# Altium PCB Barrier_control.PcbDoc
Units mil, origin at the board's own origin, x right, y up, seen from the top; angles counter-clockwise.
Board outline 2928.12 x 2495 mil, 2 copper layers (Top Layer, Bottom Layer); 57 components, 34 nets, 183 pads, 33 vias.
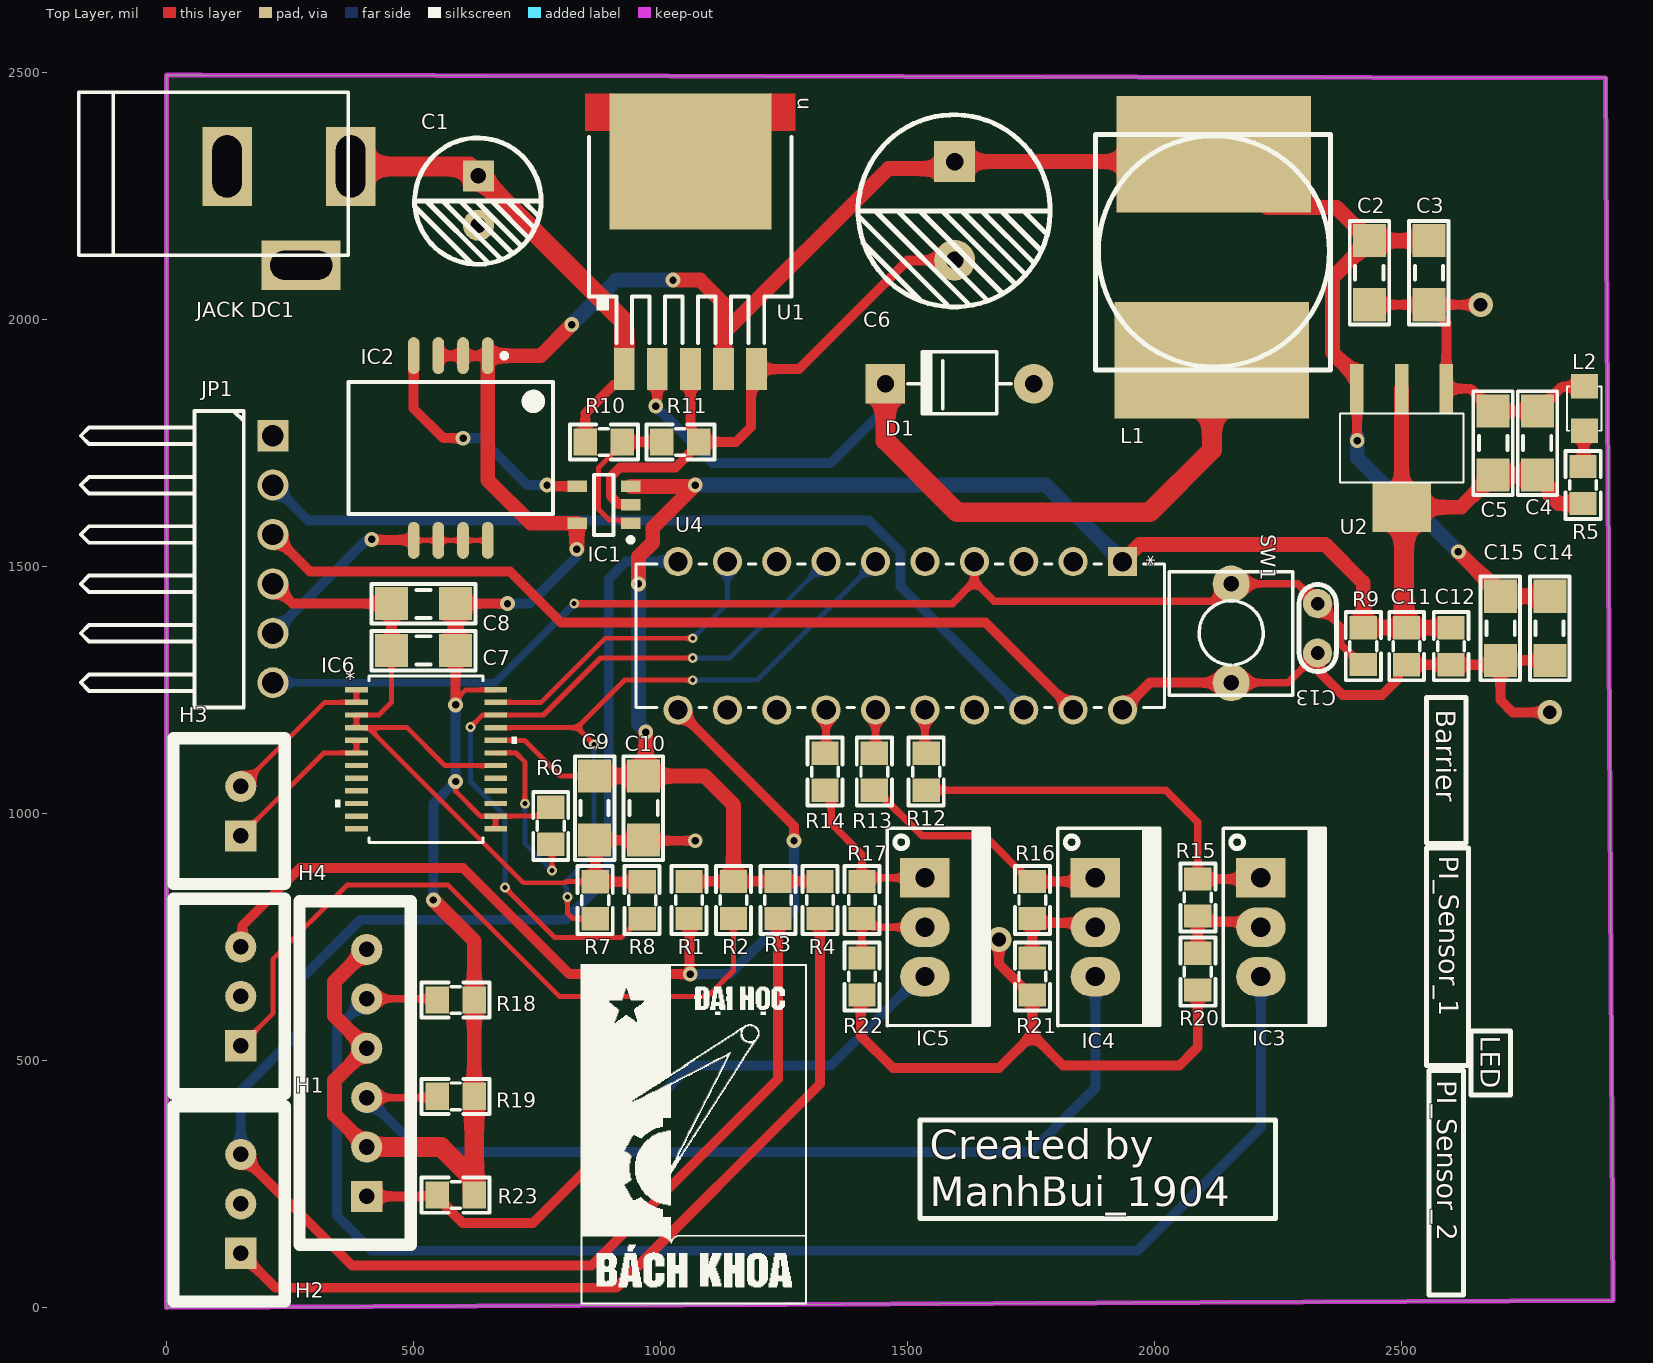
[diagram p0: Top Layer view]
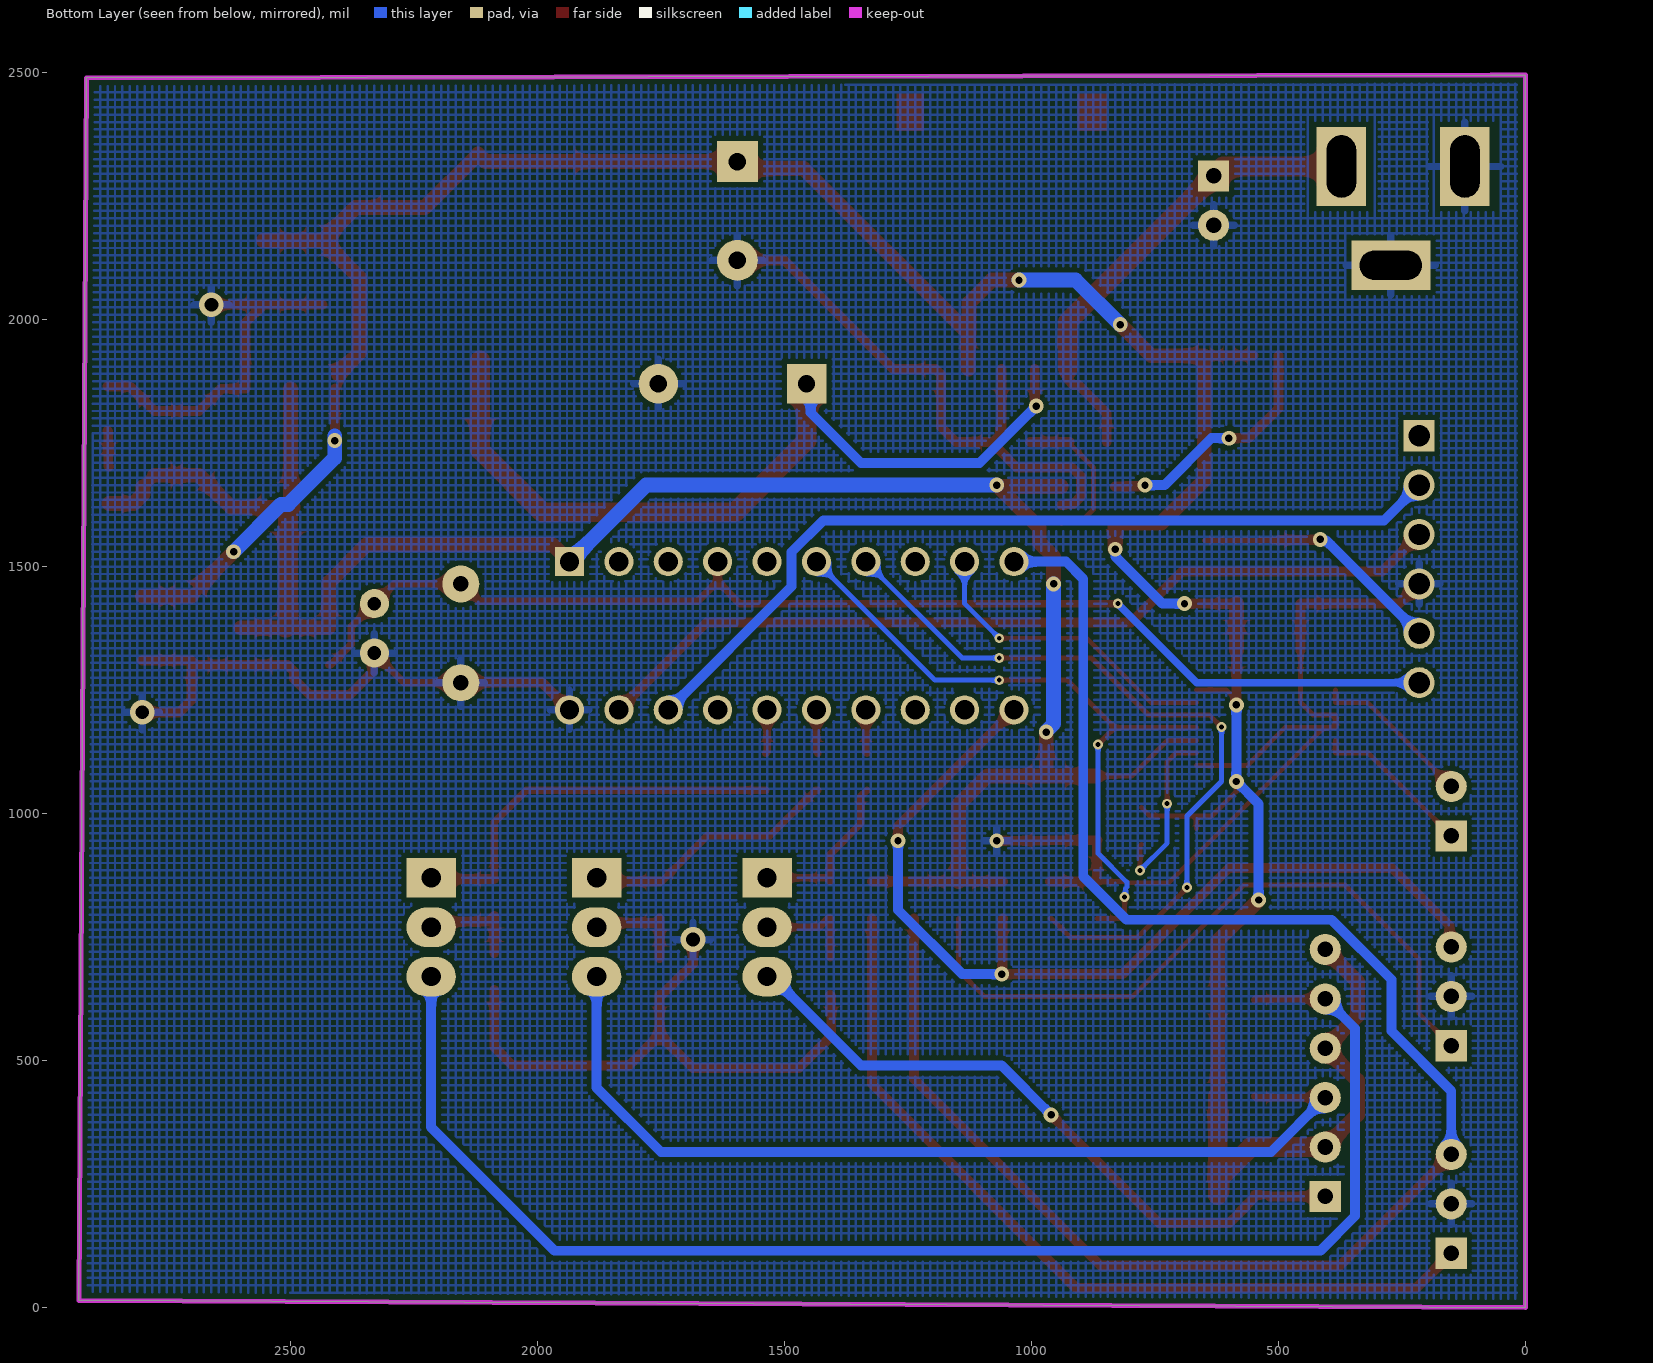
[diagram p1: Bottom Layer view, seen from below]
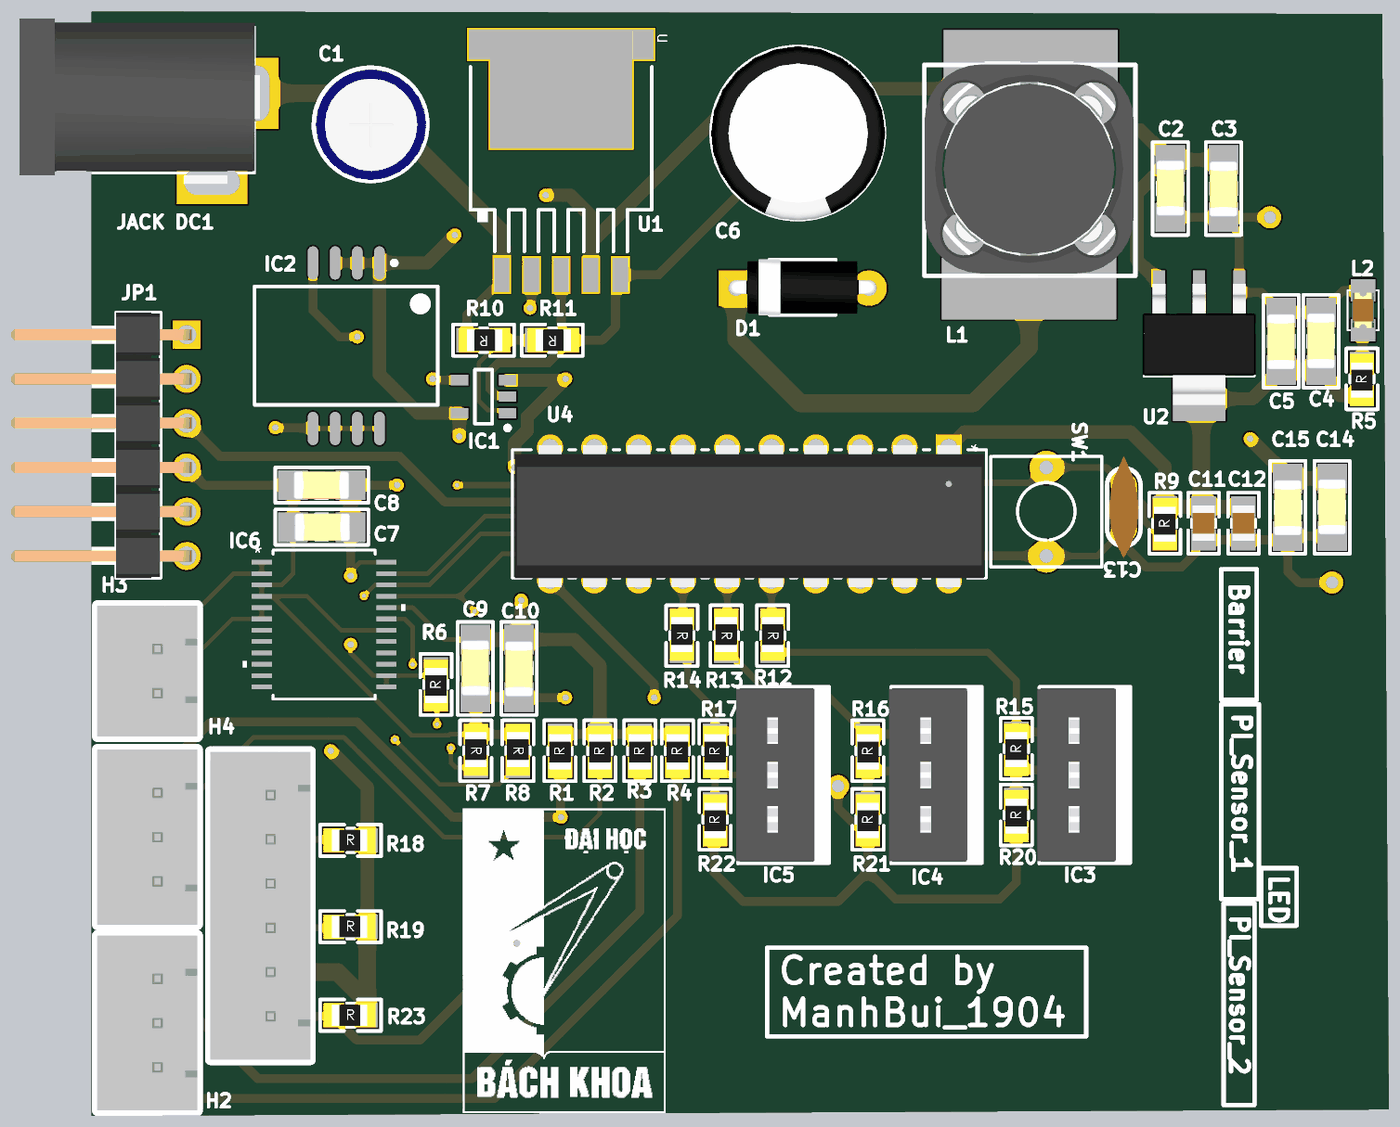
[diagram p2: 3D render of the assembled board from above, using the file's embedded part models]

## Layer stack, top to bottom
Top Solder: solder mask 0.4, Solder Resist, Dk 3.5
Top Layer: signal copper 1.4
Dielectric 1: dielectric 12.6, FR-4, Dk 4.8
Bottom Layer: signal copper 1.4
Bottom Solder: solder mask 0.4, Solder Resist, Dk 3.5

## Board outline
0,0 0,2495 70,2495 2913.12,2489.56 2928.12,14.64

## Design rules (kind name [scope] priority, off if disabled: settings)
Clearance Clearance_1 [All] p1: gap=10 ignorepadtopadclearanceinfootprint=FALSE except(0: Arc-Hole Track-Hole SMDPad-Hole THPad-Hole Via-Hole Fill-Hole Poly-Hole Region-Hole Text-Hole)
Clearance [All vs InPolygon] p2: gap=15 ignorepadtopadclearanceinfootprint=FALSE
HoleSize [All] p1: absolutevalues=TRUE maxlimit=150 minlimit=1 maxpercent=80.000 minpercent=20.000
MinimumSolderMaskSliver [All] p1: minsoldermaskwidth=5
PolygonConnect [All] p1: connectstyle=Relief reliefconductorwidth=15 reliefentries=4 polygonreliefangle="90 Angle" airgapwidth=10
RoutingVias [All] p1: holewidth=15 width=30 viastyle="Through Hole" minholewidth=10 minwidth=20 maxholewidth=28 maxwidth=50
SilkToSilkClearance [All] p1: silktosilkclearance=2
SilkToSolderMaskClearance [IsPad] p1: minsilkscreentomaskgap=1 clearancetoexposedcopper=TRUE
SolderMaskExpansion SolderMaskExpansion_1 [All] p1: expansion=4 istentingtop=FALSE
SolderMaskExpansion [isVia] p2: expansion=4 istentingtop=TRUE
Width [All] p1: maxlimit=40 minlimit=10 preferedwidth=20
26 further rules are at their usual default settings.

## Components (designator, comment, footprint, x,y, rotation, side; value= is the part's Value field where it differs from the comment)
C1 "220uF" "tu hoa 6.5mm" 630,2240 r270 top
C2 "106" "tu 1206" 2435,2095 r90 top
C3 "104" "tu 1206" 2555,2095 r270 top
C4 "104" "tu 1206" 2775,1750 r90 top
C5 "106" "tu 1206" 2685,1750 r270 top
C6 "330uF" "tu hoa 10mm" 1595,2220 r270 top
C7 "106" "tu 1206" 520,1330 r0 top
C8 "104" "tu 1206" 520,1425 r180 top
C9 "106" "tu 1206" 866.43,1011.1 r90 top
C10 "104" "tu 1206" 965,1011.1 r270 top
C11 "104" "tu 0805" 2510,1339 r270 top
C12 "104" "tu 0805" 2600,1339 r270 top
C13 "104" "tu gom" 2330,1375 r270 top
C14 "106" "tu 1206" 2800,1375 r90 top
C15 "104" "tu 1206" 2700,1375 r270 top
D1 "1n5824" "DIODE 1A" 1805,1870 r0 top
H1 "Header 3P 2.54" XH2.54M-3 150,530 r90 top
H2 "Header 3P 2.54" XH2.54M-3 150,110 r90 top
H3 "Header 2P 2.54" XH2.54M-2 150,955 r90 top
H4 "Header 6P 2.54" XH2.54M-6 405,225 r90 top
IC1 "LM321" SOT23_LM321 885,1625 r180 top
IC2 "P_mosfet AO4411" SOIC8_AO4411 575,1740 r270 top
IC3 "2SD880L" TO220 2215,870 r270 top
IC4 "2SD880L" TO220 1880,870 r270 top
IC5 "2SD880L" TO220 1535,870 r270 top
IC6 "IC điều khiển động cơ" SSOP24-P-300-0p65A_TOS 525,1110 r0 top
"JACK DC1" "JACK DC 5.5" "JACK DC 5.5" 247.28,2210 r0 top value="Jac DC"
JP1 "JP 1x6 2.54" "JP 1x6 DC" 115,1215 r270 top
L1 "33uH" "Cuon Cam 12x12x10" 2356.22,2374.37 r180 top
L2 "LED 0805" LED-0805-Red 2870,1775 r90 top
R1 "1k" "tro smd 0805" 1055,825 r90 top
R2 "30k" "tro smd 0805" 1145,825 r90 top
R3 "1k" "tro smd 0805" 1235,825 r90 top
R4 "30k" "tro smd 0805" 1320,825 r90 top
R5 "220R" "tro smd 0805" 2865,1665 r90 top
R6 "10k" "tro smd 0805" 775,975 r90 top
R7 "10k" "tro smd 0805" 870,825 r270 top
R8 "10k" "tro smd 0805" 965,825 r270 top
R9 "1k" "tro smd 0805" 2420,1338.9 r90 top
R10 "10k" "tro smd 0805" 885,1750 r180 top
R11 "10k" "tro smd 0805" 1040,1750 r180 top
R12 "3.3k" "tro smd 0805" 1540,1085 r270 top
R13 "3.3k" "tro smd 0805" 1435,1085 r270 top
R14 "3.3k" "tro smd 0805" 1335,1085 r270 top
R15 "33k" "tro smd 0805" 2085,830 r90 top
R16 "33k" "tro smd 0805" 1750,825 r90 top
R17 "33k" "tro smd 0805" 1405,825 r90 top
R18 "10k" "tro smd 0805" 585,625 r0 top
R19 "10k" "tro smd 0805" 585,430 r0 top
R20 "10R" "tro smd 0805" 2085,680 r90 top
R21 "10R" "tro smd 0805" 1750,670 r90 top
R22 "10R" "tro smd 0805" 1405,670 r90 top
R23 "10k" "tro smd 0805" 585,230 r0 top
SW1 "SW" SW2 2155,1465 r270 top value="SW chip 2 pin"
U1 "LM2596SX-5.0NOPB" KTT0005B 1060,2110 r270 top
U2 "LM1117-3.3V" LM1117-SOP 2500,1810 r180 top
U4 "PIC16F690-IP" PDIP20_300MC_MCH 1935,1510 r270 top

## Footprints (in the part's own frame and the unit in brackets; to place one, negate y for a bottom-side part, rotate by r counter-clockwise, add the part's x,y. Pads: shape width x height; smd on the part's side, far side on the other; paste and mask are expansions set on the pad)
"Cuon Cam 12x12x10" [mm] "Cuon Cam 12x12x10"
  rect 10x6 smd: 1(6.1,11.6) 2(6,1)
  silkscreen extent 0,0 12.1,12.1, body extent 0.1,-0.2 12.1,12.14, height 7.51
"DIODE 1A" [mil] "Diode 1A"
  round 80 hole 35: 1(-50,0)
  rect 80x80 hole 35: 2(-350,0)
  silkscreen extent -305,-61 -95,65, body extent -366,-61 -34,65, height 122
"JACK DC 5.5" [mil] "Jac DC input"
  rect 100x160 hole 59.06 slot 125.98 at 90 deg: 1(125,100) 2(-125,100)
  rect 160x100 hole 59.06 slot 125.98 at 0 deg: 3(25,-100)
  silkscreen extent -425,-80 120,250, body extent -410,-105 134,269, height 434
"JP 1x6 DC" [mm] "6 pins, 1 row, right angled, gold plating"
  rect 1.6x1.6 hole 1.1: 1(-13.97,2.54)
  round 1.6 hole 1.1: 2(-11.43,2.54) 3(-8.89,2.54) 4(-6.35,2.54) 5(-3.81,2.54) 6(-1.27,2.54)
  silkscreen extent -15.24,-7.34 0,1.04, body extent -15.24,-7.52 0,2.84, height 2.54
KTT0005B [mm]
  rect 2.16x1.07 smd paste-0.102 mask+0.051: 1(5.338,-3.4) 2(5.338,-1.7) 3(5.338,0.005) 4(5.338,1.7) 5(5.338,3.4)
  rect 6.99x8.33 smd paste-0.102 mask+0.051: 6(-5.338,0)
  Top Layer region: -8.832,-3.9 -8.832,-5.4 -6.923,-5.4 -6.923,-3.9
  Top Layer region: -8.832,5.4 -8.832,4 -6.923,4 -6.923,5.4
  silkscreen extent -6.6,-5.2 4,5.2
LED-0805-Red [mil]
  rect 50x55 smd: 1(0,0) 2(90,0)
  silkscreen extent 0,-35 90,35, body extent 5,-25 85,25, height 43
LM1117-SOP [mm]
  rect 0.7x2.54 smd: 1(-2.3,-1.27) 2(0,-1.27) 3(2.3,-1.27)
  rect 3x2.54 smd: 2(0,4.826)
  silkscreen extent -3.18,0 3.17,3.56, body extent -3.25,-1.78 3.25,5.18, height 1.68
PDIP20_300MC_MCH [mil]
  rect 59x59 / inner round 60 / far side rect 59x59 hole 39 paste-99999 mask+0: 1(0,0)
  round 59 / inner round 60 / far side round 59 hole 39 paste-99999 mask+0: 2(0,-100) 3(0,-200) 4(0,-300) 5(0,-400) 6(0,-500) 7(0,-600) 8(0,-700) 9(0,-800) 10(0,-900) 11(300,-900) 12(300,-800) 13(300,-700) 14(300,-600) 15(300,-500) 16(300,-400) 17(300,-300) 18(300,-200) 19(300,-100) 20(300,0)
  silkscreen extent 5,-985 295,85, body extent -5,-980 315,80, height 215
SOIC8_AO4411 [mm] "SOIC, 8-Leads, Body 10.30x7.50mm, Pitch 1.27mm, IPC Medium Density"
  oval 1.9x0.6 smd: 1(-4.75,1.905) 2(-4.75,0.635) 3(-4.75,-0.635) 4(-4.75,-1.905) 5(4.75,-1.905) 6(4.75,-0.635) 7(4.75,0.635) 8(4.75,1.905)
  silkscreen extent -4.87,-5.25 3.4,5.25, body extent -3.8,-5.25 3.8,5.25, height 2.65
SOT23_LM321 [mm]
  rect 1x0.6 smd: 1(-1.375,0.95) 2(-1.375,0) 3(-1.375,-0.95) 4(1.375,-0.95) 5(1.375,0.95)
  silkscreen extent -1.5,-1.55 0.5,1.92, body extent -0.88,-1.52 0.87,1.53, height 1.45
SSOP24-P-300-0p65A_TOS [mm]
  rect 1.161x0.271 smd paste+0 mask+0: 1(-3.575,3.575) 2(-3.575,2.925) 3(-3.575,2.275) 4(-3.575,1.625) 5(-3.575,0.975) 6(-3.575,0.325) 7(-3.575,-0.325) 8(-3.575,-0.975) 9(-3.575,-1.625) 10(-3.575,-2.275) 11(-3.575,-2.925) 12(-3.575,-3.575) 13(3.575,-3.575) 14(3.575,-2.925) 15(3.575,-2.275) 16(3.575,-1.625) 17(3.575,-0.975) 18(3.575,-0.325) 19(3.575,0.325) 20(3.575,0.975) 21(3.575,1.625) 22(3.575,2.275) 23(3.575,2.925) 24(3.575,3.575)
  silkscreen extent -4.66,-4.28 4.66,4.28
SW2 [mil] "SW button 2pin, 250x 250 mil"
  round 75 hole 31: 1(0,0) 2(200,0)
  silkscreen extent -25,-125 225,125
TO220 [mil] "TO-220"
  rect 80x100 hole 39: 1(0,0)
  oval 80x100 hole 39: 2(100,0) 3(200,0)
  silkscreen extent -100,-76 300,130, body extent -95,-80 295,97, height 323
"tro smd 0805" [mm]
  rect 1.2x1.4 smd: 1(-0.946,-0.061) 2(0.954,-0.061)
  silkscreen extent -1.75,-0.97 1.75,0.84, body extent -1.56,-0.76 1.44,0.64, height 0.53
"tu 0805" [mm] "Compoment SMD 80x50mil"
  rect 1.2x1.4 smd: 1(-0.946,-0.003) 2(0.954,-0.003)
  silkscreen extent -1.75,-0.89 1.75,0.89, body extent -1.01,-0.64 1.01,0.63, height 0.61
"tu 1206" [mm]
  rect 1.7x1.7 smd: 1(-1.65,0) 2(1.65,0)
  silkscreen extent -2.67,-1.02 2.67,1.02, body extent -1.57,-0.8 1.63,0.8, height 0.94
"tu gom" [mm] "Tu gom mini"
  round 1.5 hole 0.7: 1(-1.27,0) 2(1.27,0)
  silkscreen extent -2.25,-0.97 2.22,0.97, body extent -2.92,-0.85 2.92,0.85, height 6.12
"tu hoa 6.5mm" [mm]
  rect 1.6x1.6 hole 0.8: 1(-1.295,0.025)
  round 1.6 hole 0.8: 2(1.245,0.025)
  silkscreen extent -3.25,-3.25 3.25,3.25, body extent -3.15,-3.15 3.2,3.2, height 14.55
"tu hoa 10mm" [mm]
  rect 2.1x2.1 hole 0.9: 1(-2.54,0)
  round 2.1 hole 0.9: 2(2.54,0)
  silkscreen extent -4.95,-4.96 4.93,4.92, body extent -5,-5 4.97,5, height 20.01
XH2.54M-2 [mm]
  rect 1.6x1.6 hole 0.8: 1(0,0)
  round 1.6 hole 0.8: 2(2.54,0)
  silkscreen extent -2.48,-2.26 5.02,3.46, body extent -2.48,-2.26 5.02,3.48, height 6.91
XH2.54M-3 [mm]
  rect 1.6x1.6 hole 0.8: 1(0,0)
  round 1.6 hole 0.8: 2(2.54,0) 3(5.08,0)
  silkscreen extent -2.48,-2.26 7.56,3.46, body extent -2.48,-2.26 7.56,3.48, height 6.91
XH2.54M-6 [mm]
  rect 1.6x1.6 hole 0.8: 1(0,0)
  round 1.6 hole 0.8: 2(2.54,0) 3(5.08,0) 4(7.62,0) 5(10.16,0) 6(12.7,0)
  silkscreen extent -2.48,-2.26 15.18,3.46, body extent -2.48,-2.26 15.18,3.48, height 6.91

## Part data
C1: library part "Tu Hoa 220uF 16V 7x11", "Cắm", Chung_Loai=Cắm, Don_Vi=Con, Ma_Hang=MH008416, So_Chan=2, Ten_Linh_Kien="Tụ Hóa 220uF 16V 7x11MM"
C2 C5 C7 C9 C14: library part "Tu 1206 106 16V 20%", "Dán", Chung_Loai=Dán, Don_Vi=Con, Ma_Hang=MH004541, So_Chan=2, Ten_Linh_Kien="Tụ 1206 106-10uF 20% 16V"
C3 C4 C8 C10 C15: library part "Tu 1206 104 50V 20%", "Dán", Chung_Loai=Dán, Don_Vi=Con, Ma_Hang=MH004544, So_Chan=2, Ten_Linh_Kien="Tụ 1206 104-0.1uF 20% 50V"
C6: library part "Tu Hoa 330uF 35V 10x12", "Cắm", Chung_Loai=Cắm, Don_Vi=Con, Ma_Hang=MH004802, So_Chan=2, Ten_Linh_Kien="Tụ Hóa 330uF 35V 10x12MM"
C11 C12: library part "Tu 0805 104 50V 10%", "Dán", Chung_Loai=Dán, Don_Vi=Con, Ma_Hang=MH004551, So_Chan=2, Ten_Linh_Kien="Tụ 0805 104-100nF 10% 50V"
C13: library part "Tu gom 104 50V", "Cắm", Chung_Loai=Cắm, Don_Vi=Con, Ma_Hang=MH004761, So_Chan=2, Ten_Linh_Kien="Tụ gốm 104 100nF 50V"
D1: library part "Diode 1N4007", "Cắm", Chung_Loai=Cắm, Don_Vi=Con, Ma_Hang=MH001063, Ten_Linh_Kien="Diode 1N4007 1A (DIP)"
H1 H2: library part "Header 3P 2.54 Duc Thang", "Cắm", Chung_Loai=Cắm, Don_Vi=Con, Ma_Hang=MH001292, Ten_Linh_Kien="Header 3P XH2.54-3P Đực Thẳng"
H3: library part "Header 2P 2.54 Duc Thang", "Cắm", Chung_Loai=Cắm, Don_Vi=Con, Ma_Hang=MH001283, Ten_Linh_Kien="Header 2P XH2.54-2P Đực Thẳng"
H4: library part "Header 6P 2.54 Duc Thang", "Cắm", Chung_Loai=Cắm, Don_Vi=Con, Ma_Hang=MH001972, Ten_Linh_Kien="Header 6P XH2.54-6P Đực Thẳng"
IC3 IC4 IC5: library part "transistor NPN"
IC6: library part TB6612FNG
JP1: library part "JP 1x6 2.54 Duc Cong", "Cắm", Chung_Loai=Cắm, Don_Vi=Con, Ma_Hang=MH000904, Ten_Linh_Kien="Jump Đơn Đực 2.54MM 1x40P Cong Đứng"
L1: library part "CUON CAM 100uH SMD", "Dán", Chung_Loai=Dán, Don_Vi=Con, Ten_Linh_Kien="Cuộn Cảm 100uH 7x7x4MM CD74"
L2: library part "LED 0805 Do", "Dán", Chung_Loai=Dán, Don_Vi=Con, Ma_Hang=MH000897, Ten_Linh_Kien="LED 0805 Màu Đỏ (Red)"
R1 R3 R9: library part "Tro 0805 1% 1k", "Dán", Chung_Loai=Dán, Don_Vi=Con, Ma_Hang=MH005468, So_Chan=2, Ten_Linh_Kien="Trở 0805 1% 1k"
R2 R4 R15 R16 R17: library part "Tro 0805 1% 33k", "Dán", Chung_Loai=Dán, Don_Vi=Con, Ma_Hang=MH005478, So_Chan=2, Ten_Linh_Kien="Trở 0805 1% 33k"
R5: library part "Tro 0805 1% 0.5R", "Dán", Chung_Loai=Dán, Don_Vi=Con, Ma_Hang=MH005465, So_Chan=2, Ten_Linh_Kien="Trở 0805 1% 0.5R"
R6 R7 R8 R10 R11 R18 R19 R23: library part "Tro 0805 1% 10k", "Dán", Chung_Loai=Dán, Don_Vi=Con, Ma_Hang=MH005473, So_Chan=2, Ten_Linh_Kien="Trở 0805 1% 10k"
R12 R13 R14: library part "Tro 0805 1% 3.3k", "Dán", Chung_Loai=Dán, Don_Vi=Con, Ma_Hang=MH005472, So_Chan=2, Ten_Linh_Kien="Trở 0805 1% 3.3k"
R20 R21 R22: library part "Tro 0805 1% 10R", "Dán", Chung_Loai=Dán, Don_Vi=Con, Ma_Hang=MH005474, So_Chan=2, Ten_Linh_Kien="Trở 0805 1% 10R"
SW1: library part SW2, "Switch button 2 pin"
U1: "No Description Available", Alternate_PartNumber=LM2596S-ADJ/NOPB, Manufacturer="Texas Instruments", PartNumber=LM2596SX-ADJ/NOPB, CompType=IC, Mfr_Name="Texas Instruments", MountType=SMT, PackageReference=KTT0005B, RefDes=RefDes, RoHS=Y, TYPE=TYPE
U2: library part LM1117, "800mA Low-Dropout Linear Regulator", Creator="Nguyen Ba Bien", Website=http://group3i.net
U4: "No Description Available", Mfr_Name=Microchip, RefDes=RefDes, TYPE=Type

## Via types
v1: diameter 30, hole 15, Top Layer to Bottom Layer, 20 vias
v2: diameter 20, hole 10, Top Layer to Bottom Layer, 10 vias
v3: diameter 50, hole 28, Top Layer to Bottom Layer, 3 vias

## Nets (pads, with @x,y where several pads share a name; then routed paths per layer and width w, separated by ;. In a path a pad name is that pad's centre, name@x,y a point inside that pad or via, vN(x,y) a via of type N, cw(c..) or ccw(c..) an arc to the next point about the centre after c; other vN are vias at no path point)
+3.3: C4.1 C5.2 C9.2 C10.1 C11.1 C12.1 IC1.3 IC6.20 R1.2 R2.2 R3.2 R4.2 R5.1 R9.2 U2.2 U4.1 | length 4375.8
  Top Layer w10: IC6.20 724.46,1148.39 796.78,1076.06 C9.2
  Top Layer w20: C10.1 C10.1@970,1081.06 ; R1.2 R2.2@1143.46,862.57 ; v1@1064.26,1661.97 1067.29,1665 v1(1070,1665) ; R2.2 R3.2 R4.2 ; R9.2 R9.2@2422.52,1376.35 ; C11.1@2508.43,1376.35 2509.74,1376.35 C11.1 ; C4.1 C4.1@2798.46,1661.57
  Top Layer w30: C9.2 C10.1 1088.94,1076.06 1147.39,1017.61 R2.2 ; IC1.3@939.57,1661.97 v1@1064.26,1661.97 ; v1(955,1465) 955,1520 983.82,1548.82 983.82,1578.82 v1(1070,1665) ; C10.1@970,1081.06 v1(970,1165) ; U4.1 1970,1545 2345,1545 2422.39,1467.61 R9.2 ; R9.2@2422.52,1376.35 C11.1@2508.43,1376.35 ; U2.2@2500,1860 2500,1620 2619.96,1620 C5.2 C4.1 ; C11.1 C12.1 ; C4.1@2798.46,1661.57 2798.46,1646.54 2817.23,1627.77 R5.1
  Top Layer w40: U2.2@2500,1620 2504.93,1615.07 2504.93,1379.85 2508.43,1376.35 2508.56,1376.23 C11.1
  Bottom Layer w20: v1(970,1165) v1@970,1166.72
  Bottom Layer w30: v1(955,1465) 955,1181.72 v1@970,1166.72 ; v1(1070,1665) 1780,1665 U4.1
+5: C2.2 C3.1 C6.1 C7.2 C8.1 C14.2 C15.1 H4.2 H4.4 H4.6 IC1.5 IC2.1 IC2.2 IC2.3 IC6.13 IC6.14 IC6.24 L1.2 R6.2 R18.2 R19.2 R23.2 U1.4 U2.3 | length 6625
  Top Layer w10: C7.2 C7.2 ; v1(585,1065) 585,1045 635.16,994.84 IC6.14 ; v1@585,1230 605.42,1250.42 665.42,1250.42 IC6.24 ; IC6.13 IC6.14 ; R6.2 759.66,994.84 IC6.14 ; IC1.5@825,1581.73 830.43,1587.17 IC1.5
  Top Layer w20: IC2.3 IC2.2 IC2.1 ; C7.2 v1(585,1220) v1(585,1220) ; C8.1 v1(690,1425) ; v1(830,1535) v1@830.43,1535.43 ; U2.3@2409.12,1860.33 U2.3 ; v1@2409.72,1750.28 v1@2410,1750 ; v1@2409.72,1765.28 U2.3@2409.72,1859.72 ; C15.1@2676.54,1468.46 2676.54,1463.43 C15.1
  Top Layer w30: H4.2 340,390 340,460 H4.4 340,590 340,660 H4.6 ; v1(540,825) 622.57,742.43 R18.2 R19.2 ; C7.2 C8.1 ; v1(820,1990) 757.01,1927.01 IC2.1 650,1675 737.4,1587.6 IC1.5 ; v1@830.43,1535.43 IC1.5@830.43,1587.17 ; v1(1025,2080) 1080,2080 1125.96,2034.04 1125.96,1972.99 ; U1.4 1127.99,1900.93 1127.99,1972.99 1460.67,2305.67 1580.67,2305.67 C6.1 2105,2320 L1.2 2228.11,2226.89 2368.07,2226.89 C2.2 ; U2.3@2403.23,1890 2360,1933.23 2360,2084.96 C2.2 ; C3.1 C2.2 ; v1(2615,1530) C15.1@2676.54,1468.46 ; C15.1 C14.2
  Top Layer w40: H4.2 555.69,325 618.95,261.73 618.95,235.17 R23.2@622.57,231.54 ; R23.2 R23.2@622.57,231.54 ; R19.2 R23.2@622.57,231.54
  Bottom Layer w20: v1(540,825) 540,1020 v1(585,1065) v1(585,1220) ; v1(690,1425) 735,1425 830,1520 v1(830,1535)
  Bottom Layer w30: v1(820,1990) 910,2080 v1(1025,2080) ; v1@2410,1765 2410,1720 2504.04,1625.96 2519.04,1625.96 v1(2615,1530)
  other v1: 2410,1755
AIN1: IC6.21 R7.2 U4.6 | length 1384.9
  Top Layer w10: IC6.21@665.92,1174.15 830.85,1174.15 ; v2(811.23,831.2) 811.23,798.77 822.57,787.43 R7.2 ; v2(865,1140) 830.85,1174.15 ; v2(1065,1270) 926.69,1270 830.85,1174.15
  Bottom Layer w10: v2(811.23,831.2) 809.31,833.11 809.31,848.45 806.56,851.2 806.56,861.2 865,919.64 v2(865,1140) ; v2(1065,1270) 1195,1270 U4.6
AIN2: IC6.22 R8.2 U4.7 | length 1548.6
  Top Layer w10: v2(615,1175) 640,1200 640.1,1199.9 665.42,1199.9 IC6.22 762.91,1199.57 878.34,1315 v2(1065,1315) ; v2(685,850) 786.2,748.8 920.05,748.8 958.67,787.43 R8.2
  Bottom Layer w10: v2(615,1175) 615,1065 685,995 v2(685,850) ; v2(1065,1315) 1140,1315 U4.7
GND: "JACK DC1.2" "JACK DC1.3" C1.2 C2.1 C3.2 C4.2 C5.1 C6.2 C7.1 C8.2 C9.1 C10.2 C11.2 C12.2 C13.2 C14.1 C15.2 D1.1 H1.2 H2.2 IC1.2 IC6.3 IC6.4 IC6.18 JP1.4 L2.2 R7.1 R8.1 R11.1 R20.1 R21.1 R22.1 SW1.2 U1.3 U1.5 U2.1 U4.20 | length 6175
  Top Layer w10: C7.1 455.04,1225.04 429.57,1199.57 IC6.3 IC6.4 408.06,1173.98 ; IC6.18 563.55,1097.2 486.78,1173.98 408.06,1173.98 ; R7.1@866.43,863.41 R7.1 808.46,862.23 806.23,860 722.04,860 408.06,1173.98
  Top Layer w15: SW1.2 2270,1265 C13.2
  Top Layer w20: JP1.4 255,1425 C8.2 C7.1 ; IC1.2 931.26,1625 929.45,1626.81 914.94,1626.81 899.45,1642.31 899.45,1682.5 917.69,1700.74 1030.23,1700.74 1048.47,1718.98 1048.47,1719.7 1077.23,1748.46 R11.1 ; R8.1 R7.1 867.61,944.96 C9.1 C10.2 966.14,945 v1(1070,945) ; U1.3 1060.2,1781.67 1063.61,1778.26 1063.61,1766.02 R11.1 ; R22.1 1405,630.38 1405,550 1470,485 1685,485 1752.39,552.39 ; C6.2 1500,2120 1279.86,1899.86 U1.5 1182.8,1888.8 1182.8,1782.8 1152.39,1752.39 R11.1 ; v3(1685,745) 1685,695.5 1718.98,661.53 1719.7,661.53 1748.46,632.77 R21.1 1752.39,552.39 ; U4.20 1990,1265 SW1.2 ; R20.1 2087.39,527.39 2050,490 1814.79,490 1752.39,552.39 ; C13.2 2334.59,1320.41 2334.59,1285.41 2380,1240 2460,1240 2492.31,1272.31 2492.31,1287.8 2505.93,1301.43 C12.2 2691.39,1301.43 C15.2 ; C2.1 C3.2 ; v3(2660,2030) v3(2660,2030) C3.2 ; v3(2800,1205) 2725,1205 2700,1230 C15.2 ; C14.1 C15.2 ; L2.2@2867.5,1865 L2.2 ; L2.2@2869.18,1864.18 2824.22,1864.18 C4.2 C5.1 2639.96,1860 U2.1 2590.55,1994.49 C3.2
  Bottom Layer w40: H1.2@144.58,630 H1.2 H1.2@150,636.22
Green_ctrl: R14.1 U4.14 | length 88.8
  Top Layer w15: R14.1 1335,1124.62 U4.14
Green_led: H4.1 IC5.3 R23.1 | length 1369.1
  Top Layer w15: 518.01,227.61 537.39,227.61 R23.1
  Top Layer w20: H4.1 518.01,225 ; R23.1@537.39,227.61 R23.1 ; R23.1@547.77,223.67 578.95,192.49 578.95,191.76 599.43,171.29 741.29,171.29 v1(960,390)
  Bottom Layer w20: v1(960,390) 1060,490 1345,490 1525,670 IC5.3
MCLR: C13.1 JP1.6 R9.1 SW1.1 U4.4 | length 2451.5
  Top Layer w15: v2(825,1425) 1590,1425 1635,1470 ; U4.4 1635,1470 ; R9.1 2418.46,1301.67 2377.03,1343.1 2377.03,1377.97 C13.1 2290,1465 2152.57,1465 2117.57,1430 1675,1430 1635,1470
  Bottom Layer w15: JP1.6 665,1265 v2(825,1425)
NetD1_2: D1.2 L1.1 U1.2 | length 1754.3
  Top Layer w20: v1(990,1825) 993.07,1828.07 U1.2
  Top Layer w40: D1.2 1455,1755 1600,1610 1990,1610 2116.06,1736.06 L1.1
  Bottom Layer w20: v1(990,1825) 1105,1710 1345,1710 1446.72,1811.72 1446.72,1861.72 D1.2
NetH1_1: H1.1 R2.1 | length 1416.7
  Top Layer w10: H1.1 215,595 215,705 365,855 570,855 795,630 1095,630 1147.39,682.39 R2.1
NetH2_1: H2.1 R4.1 | length 1707.6
  Top Layer w20: H2.1 220,40 910,40 1322.39,452.39 R4.1
NetH3_1: H3.1 IC6.5 IC6.6 | length 329.3
  Top Layer w10: H3.1 317.8,1122.8 IC6.6 IC6.5
NetH3_2: H3.2 IC6.1 IC6.2 | length 330.3
  Top Layer w10: H3.2 320.16,1225.16 IC6.2 IC6.1
NetIC1_1: IC1.1 R10.1 R11.2 | length 313.1
  Top Layer w10: R10.1 922.23,1748.46 874.45,1700.68 874.45,1615.55 895.59,1594.41 932.32,1594.41 IC1.1
  Top Layer w20: R10.1 R11.2
NetIC3_1: IC3.1 R12.2 R15.2 | length 820.3
  Top Layer w15: R12.2 2022.57,1047.43 2087.39,982.61 R15.2
  Top Layer w20: R15.2 2212.57,867.57 IC3.1
NetIC3_2: IC3.2 R15.1 R20.2 | length 212.2
  Top Layer w20: R20.2 R15.1 2098.78,781.39 2203.61,781.39 IC3.2
NetIC4_1: IC4.1 R13.2 R16.2 | length 527
  Top Layer w15: R13.2 1436.54,1047.43 1528.97,955 1656.03,955 1748.46,862.57 R16.2
  Top Layer w20: R16.2 1872.57,862.57 IC4.1
NetIC4_2: IC4.2 R16.1 R21.2 | length 215.2
  Top Layer w20: R21.2 R16.1 1761.28,778.89 1871.11,778.89 IC4.2
NetIC5_1: IC5.1 R14.2 R17.2 | length 339.1
  Top Layer w15: R14.2 1345,1035.03 1345,980 1407.39,917.61 R17.2@1407.39,870 ; R17.2 1414.82,870 IC5.1
NetIC5_2: IC5.2 R17.1 R22.2 | length 215.2
  Top Layer w15: R22.2 R17.1 1411.33,787.77 1429.1,770 IC5.2
NetIC6_19: IC6.19 R6.1 | length 363.3
  Top Layer w10: IC6.19 707.2,1122.8 725,1105 v2(725,1020) ; R6.1 780,935.17 v2(780,885)
  Bottom Layer w10: v2(725,1020) 725,940 v2(780,885)
NetL2_1: L2.1 R5.2 | length 73.5
  Top Layer w20: R5.2 2868.7,1703.88 2868.7,1773.7 L2.1
PGC: JP1.2 U4.18 | length 1749.5
  Bottom Layer w20: JP1.2 286.36,1593.64 1421.36,1593.64 1485.5,1529.5 1485.5,1459.5 U4.18
PGD: JP1.3 U4.19 | length 1767
  Top Layer w20: JP1.3 290,1490 695,1490 797.88,1387.12 1657.88,1387.12 U4.19
PI_Sensor_1: H1.3 R1.1 U4.11 | length 1968.8
  Top Layer w20: H1.3 153.48,733.48 153.48,773.48 270,890 600,890 815,675 v1(1060,675) 1058.7,676.3 1058.7,786.47 R1.1 ; U4.11 1270,975 v1(1270,945)
  Bottom Layer w20: v1(1060,675) 1140,675 1270,805 v1(1270,945)
PI_Sensor_2: H2.3 R3.1 U4.10 | length 3533.6
  Top Layer w20: H2.3 375,85 860,85 1237.39,462.39 R3.1
  Bottom Layer w20: H2.3 150,438.72 270.95,559.67 270.95,663.77 392.17,785 807.45,785 895,872.55 895,1475 930,1510 U4.10
PWMA: IC6.23 U4.9 | length 637
  Top Layer w10: IC6.23 758.03,1225.16 887.87,1355 v2(1065,1355)
  Bottom Layer w10: v2(1065,1355) 1135,1425 U4.9
Red_ctrl: R12.1 U4.16 | length 88.9
  Top Layer w15: U4.16 1535,1124.83 R12.1
Red_led: H4.5 IC3.3 R18.1 | length 2916.2
  Top Layer w15: H4.5 545.38,625 R18.1
  Bottom Layer w20: H4.5 345,565 345,185 415,115 1965,115 2215,365 IC3.3
Source_Switching: IC1.4 IC2.4 | length 503.2
  Top Layer w20: IC2.4 500,1820 560,1760 v1(600,1760) ; v1(770,1665) 772.71,1665 775.3,1662.4 IC1.4
  Bottom Layer w20: v1(600,1760) 635,1760 730,1665 v1(770,1665)
V_Pickit: IC2.5 IC2.6 IC2.7 IC2.8 JP1.5 | length 514.5
  Top Layer w10: IC2.5 IC2.6 IC2.7 IC2.8
  Top Layer w20: v1(415,1555) 416,1554 499,1554 IC2.5
  Bottom Layer w20: JP1.5 403.09,1553.09 413.09,1553.09 v1(415,1555)
VIN: "JACK DC1.1" C1.1 R10.2 U1.1 | length 966.1
  Top Layer w20: R10.2 847.43,1809.95 904.81,1867.34 915.08,1867.34 926.14,1878.41 U1.1
  Top Layer w40: 372.28,2310 612,2310 C1.1 926.14,1995.86 U1.1
Yellow_ctrl: R13.1 U4.15 | length 88.8
  Top Layer w15: R13.1 1435,1124.62 U4.15
Yellow_led: H4.3 IC4.3 R19.1 | length 1943.3
  Top Layer w15: H4.3 545.17,425 R19.1
  Bottom Layer w20: H4.3 515,315 1750,315 1880,445 IC4.3
pads on no net: IC6.7 IC6.8 IC6.9 IC6.10 IC6.11 IC6.12 IC6.15 IC6.16 IC6.17 JP1.1 U1.6 U4.2 U4.3 U4.5 U4.8 U4.12 U4.13 U4.17

## Polygon pours and split planes (outlines as drawn)
GND on Bottom Layer "GND_L02_P007" (hatched 90Degree grid 15 track 5, pour order 7): 0,0 2910,0 2925,15 2910,30 2910,2490 5,2490

## Keep-outs
Keep-Out Layer:
  the board outline again, w10

## Silkscreen, mask and mechanical layers (free items; w line width, h text height)
Top Overlay:
  drawing of 38 lines, arcs and shapes, not listed
  text "Barrier" at 2570,1210 h40 r270
  text "PI_Sensor_1" at 2576.66,915 h40 r270
  text "LED" at 2660,550 h40 r270
  text "PI_Sensor_2" at 2571.66,460 h40 r270
  text "Created by" at 1545,299.99 h60
  text "ManhBui_1904" at 1545,205 h60

## Text inside footprints (layer, text, board x,y; h text height)
IC6: Top Overlay "*" at 361.75,1256.41 h30; Mechanical 13 "*" at 417.26,1220.39 h30
U1: Top Overlay "u" at 1278,2450 h30 r270
U4: Top Overlay "*" at 1969.5,1522.5 h30 r270; Mechanical 13 "*" at 1910,1502.5 h30 r270